# EAGLE board 5 servo motor with transistor to control the power (EAGLE 9.7.0)

Size 197.61 x 92.89 mm. Coordinates in mm from the lower left corner, seen from the top.
Outline: 0,0 197.61,0 197.61,92.89 0,92.89 0,0
Copper layers (1*16): Top 0.035mm / dielectric 1.5mm / Bottom 0.035mm
Design rules "default": minimum track width 6mil, minimum drill 0.35mm, track to track 6mil, track to pad 6mil, pad to pad 6mil, via to via 6mil, smd to smd 6mil, copper to edge 40mil, drill to drill 6mil, minimum pad ring 10mil, minimum via ring 8mil, stop-mask expansion 4mil, vias tented up to drill 0mil, thermal gap 10mil

## Footprints (pad centres in the part's own frame; a part is rotated, then mirrored left to right if it is on the bottom)
BATTERY-GENERIC = drill 1.118 pad 3.15 octagon: + 2.54,0; - -2.54,0
28027 = drill 1.016 long: 1 -2.54,0; 2 0,0; 3 2.54,0
TO220V = drill 1.016 long: 1 -2.54,-2.54; 2 0,-2.54; 3 2.54,-2.54
SG90 = drill 1.016 long: 1 -2.54,0; 2 0,0; 3 2.54,0
ARDUINO-UNO-R3-SHIELD = drill 1.016 pad 1.88: 3.3V 24.13,-2.54; 5V 24.13,0; A0 24.13,12.7; A1 24.13,15.24; A2 24.13,17.78; A3 24.13,20.32; A4 24.13,22.86; A5 24.13,25.4; AREF -24.13,-13.97; D2 -24.13,20.32; D3 -24.13,17.78; D4 -24.13,15.24; D5 -24.13,12.7; D6 -24.13,10.16; D7 -24.13,7.62; D8 -24.13,3.81; D9 -24.13,1.27; D10 -24.13,-1.27; D11 -24.13,-3.81; D12 -24.13,-6.35; D13 -24.13,-8.89; GND@0 24.13,2.54; GND@1 24.13,5.08; GND@2 -24.13,-11.43; IOREF 24.13,-7.62; NC 24.13,-10.16; RES 24.13,-5.08; RX -24.13,25.4; SCL -24.13,-19.05; SDA -24.13,-16.51; TX -24.13,22.86; VIN 24.13,7.62

## Placement (x,y rotation side)
P1  BATTERYGENERIC  [BATTERY-GENERIC]  13.42,32.8 180 top
PIR1  PIR-SENSOR_28027  [28027]  20.95,86.54 0 top
Q1  TIP120_TO220-V  [TO220V]  98.55,56.28 0 top
SERVO1  SERVOSG90  [SG90]  102.83,7.69 0 top
SERVO2  SERVOSG90  [SG90]  87.34,7.69 0 top
SERVO3  SERVOSG90  [SG90]  73.03,7.45 0 top
SERVO4  SERVOSG90  [SG90]  57.77,7.22 0 top
SERVO5  SERVOSG90  [SG90]  42.75,6.99 0 top
U1  ARDUINO-UNO-R3-SHIELD  [ARDUINO-UNO-R3-SHIELD]  149.73,36.79 90 top

## Library data of the parts
P1 PIR1 Q1 SERVO1-SERVO5 U1 = Tinkercad

## Nets
P1+: P1.+ SERVO1.2 SERVO2.2 SERVO3.2 SERVO4.2 SERVO5.2
P1-: P1.- Q1.3
SERVO5_GND: Q1.2 SERVO1.1 SERVO2.1 SERVO3.1 SERVO4.1 SERVO5.1
U1_D6: Q1.1 U1.D6
U1_D9: SERVO5.3 U1.D9
U1_D10: SERVO4.3 U1.D10
U1_D11: SERVO3.3 U1.D11
U1_D12: SERVO2.3 U1.D12
U1_D13: SERVO1.3 U1.D13

## Tracks (layer width: path | path; a pad name or v marks a point on that pad's centre or on a via)
P1+  (5 unrouted)
P1-  (1 unrouted)
SERVO5_GND  (5 unrouted)
U1_D6  (1 unrouted)
U1_D9  (1 unrouted)
U1_D10  (1 unrouted)
U1_D11  (1 unrouted)
U1_D12  (1 unrouted)
U1_D13  (1 unrouted)